# Altium PCB TIDA-PowerNBIoT_PCB.PcbDoc (part 1 of 3)
Units mil, origin at the board's own origin, x right, y up, seen from the top; angles counter-clockwise.
Board outline 2500 x 2750 mil, 2 copper layers (Top Layer, Bottom Layer), stack 38.548 mil thick; 82 components, 48 nets, 212 pads, 48 vias.
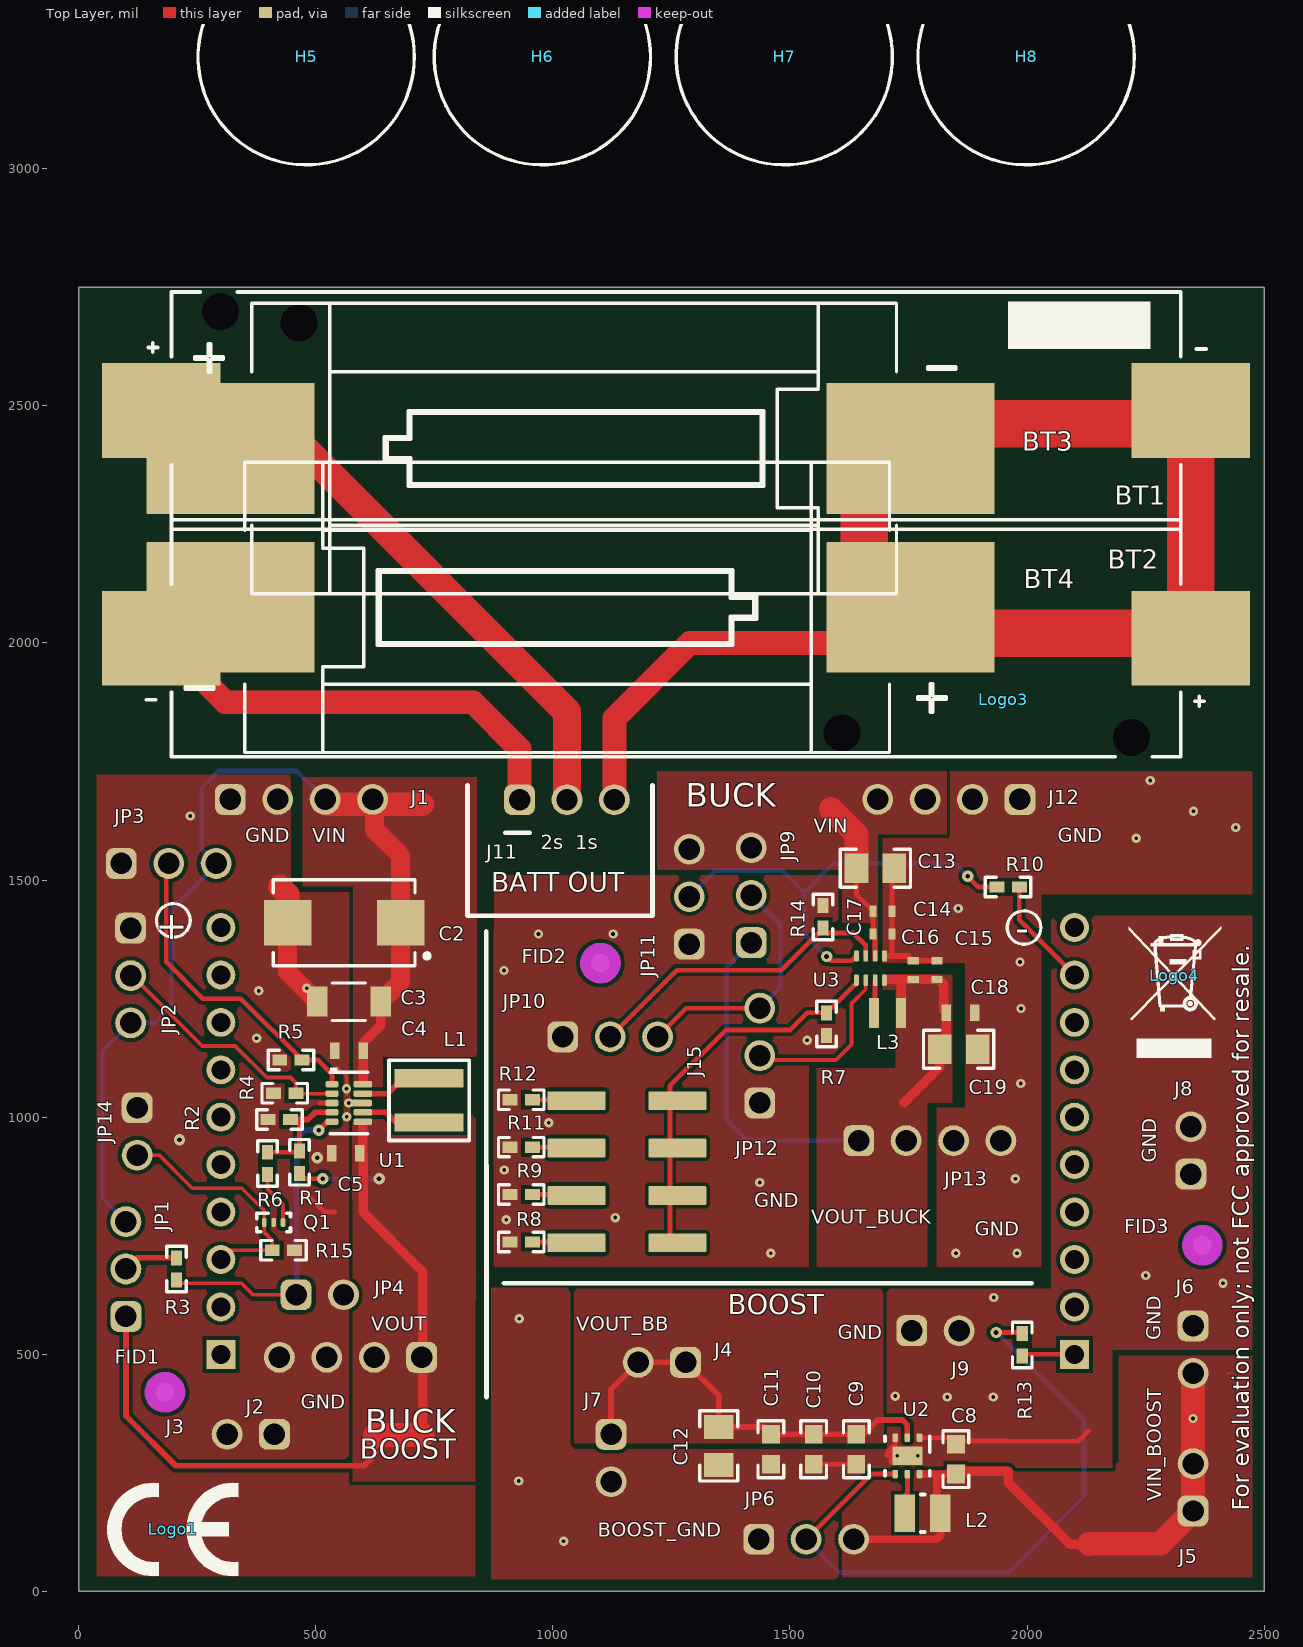
[diagram p0: Top Layer view]
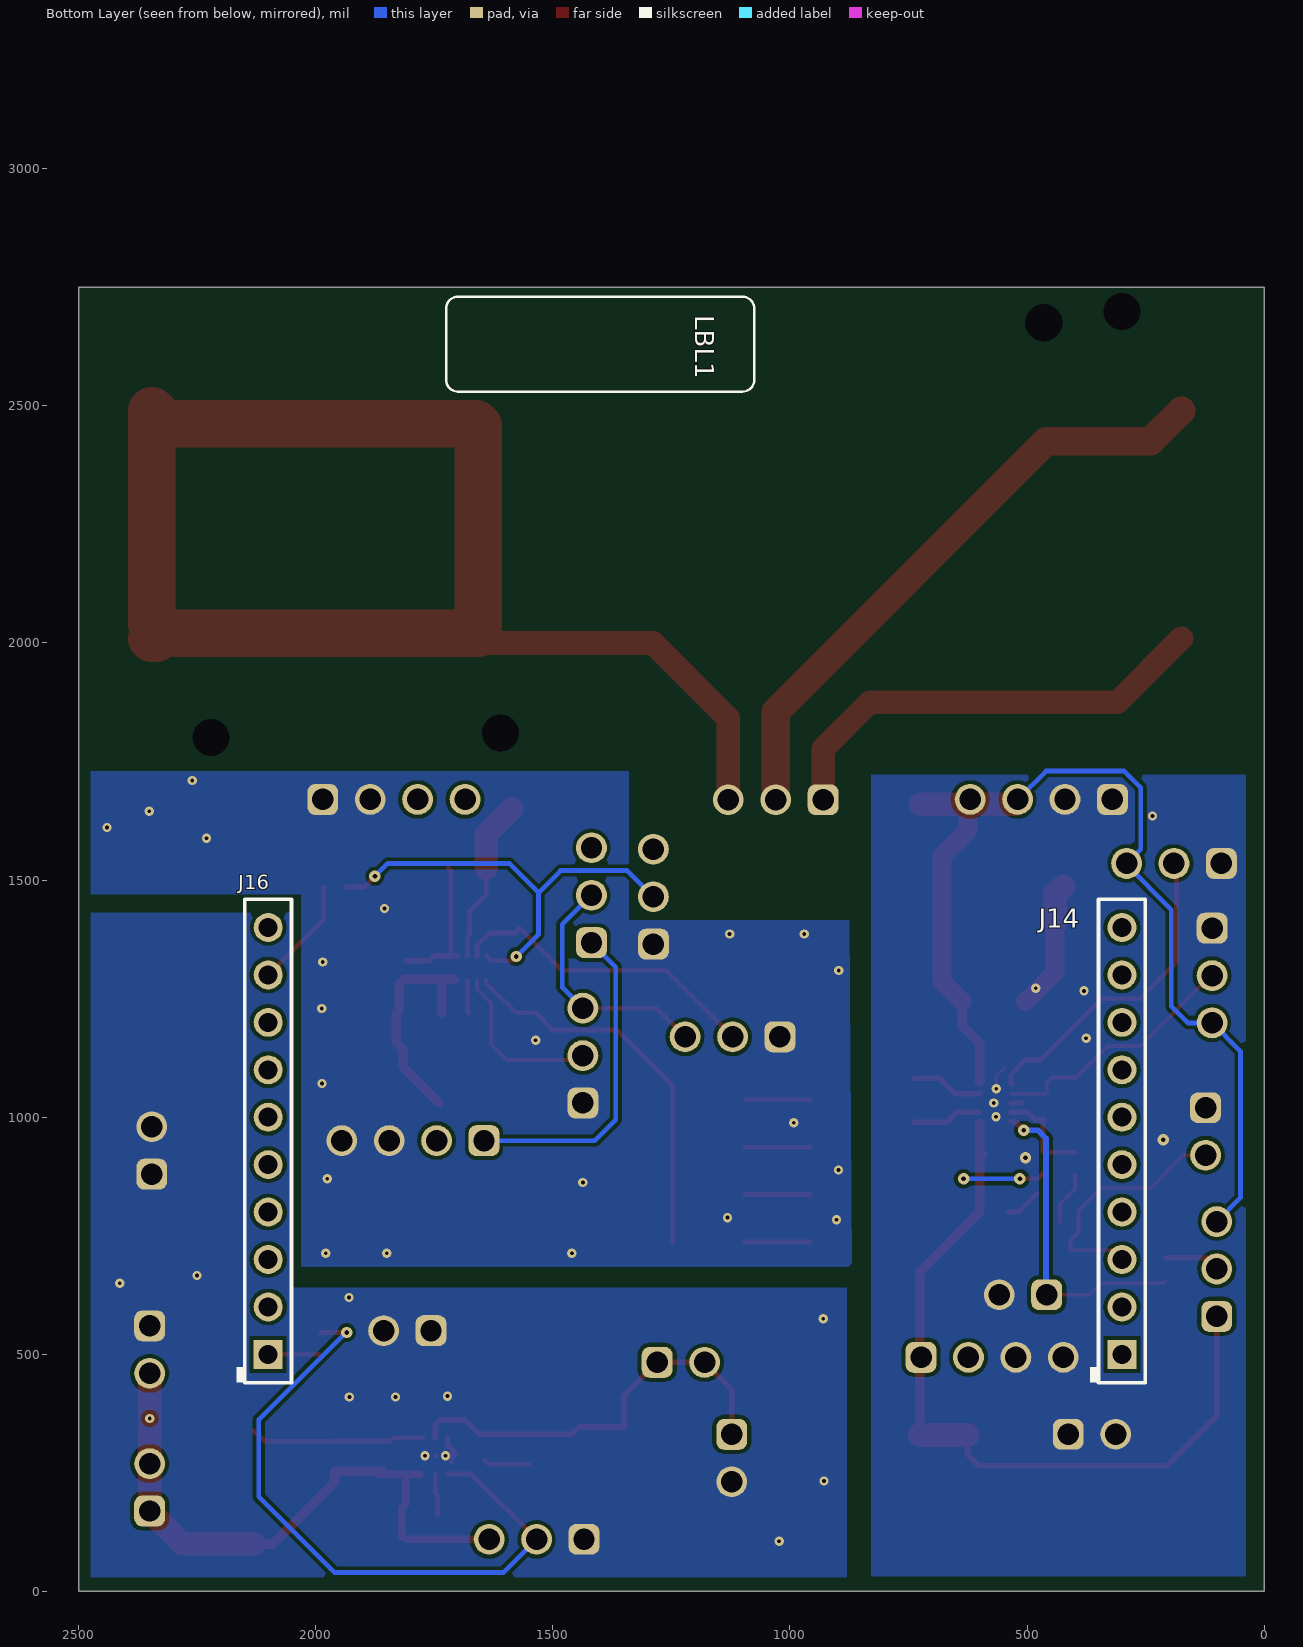
[diagram p1: Bottom Layer view, seen from below]

## Layer stack, top to bottom
Top Solder: solder mask 0.4, Solder Resist, Dk 3.5
Top Layer: signal copper 1.4
Dielectric1: core 35.748, FR-4, Dk 4.8
Bottom Layer: signal copper 1.4
Bottom Solder: solder mask 0.4, Solder Resist, Dk 3.5

## Board outline
0,0 2500,0 2500,2750 0,2750

## Design rules (kind name [scope] priority, off if disabled: settings)
AcuteAngle [All] p1: minimum=4.50000000000000E+0001 checktracksonly=FALSE
AssemblyTestPointUsage [All] p1: valid=2
BoardOutlineClearance BoardOutlineClearance_MountingHoles [OnCopper and InComponentClass('Mounting Holes')] p1: gap=40 ignorepadtopadclearanceinfootprint=FALSE except(30: Arc-OutlineEdge Track-OutlineEdge SMDPad-OutlineEdge)
BoardOutlineClearance BoardOutlineClearance_Poly [OnCopper and IsPoly] p2: gap=25 ignorepadtopadclearanceinfootprint=FALSE
BoardOutlineClearance [OnCopper and Not InComponentClass('Logo') and not InComponentClass('FiducialMark') and not InRegion(1000,500,4000,800) and not InPoly] p3: gap=40 ignorepadtopadclearanceinfootprint=FALSE
Clearance Clearance_Keepouts [((IsTrack Or IsArc) And Not InPoly) And IsFree and IsKeepOut vs ((IsTrack Or IsArc) And Not InPoly) And IsFree and IsKeepOut] p1: gap=0 ignorepadtopadclearanceinfootprint=FALSE
Clearance Clearance_Poly [InPolygon] p2: gap=8 ignorepadtopadclearanceinfootprint=FALSE except(0: Arc-Hole Track-Hole SMDPad-Hole THPad-Hole Via-Hole Fill-Hole Poly-Hole Region-Hole Text-Hole)
Clearance [All] p3: gap=5 ignorepadtopadclearanceinfootprint=FALSE except(0: Arc-Hole Track-Hole SMDPad-Hole THPad-Hole Via-Hole Fill-Hole Poly-Hole Region-Hole Text-Hole; 5.91: THPad-Via Via-Via; 7.87: THPad-THPad THPad-Fill THPad-Poly THPad-Region THPad-Text Via-Fill Via-Poly Via-Region Via-Text Fill-Fill Fill-Poly Fill-Region Fill-Text Poly-Poly Poly-Region Poly-Text Region-Region Region-Text Text-Text)
ComponentClearance ComponentClearance_MountingHoles_FiducialMarks [InComponentClass('Mounting Holes') vs InComponentClass('FiducialMark')] p1: gap=50 collisioncheckmode=3 verticalgap=10 showdistances=FALSE
ComponentClearance ComponentClearance_Shunt [InComponentClass('Header') vs InComponentClass('Shunt')] p2: gap=0 collisioncheckmode=3 verticalgap=0 showdistances=FALSE
ComponentClearance ComponentClearance_Logo [InComponentClass('Logo')] p3: gap=50 collisioncheckmode=3 verticalgap=10 showdistances=FALSE
ComponentClearance ComponentClearance_ScrewToNut [(HasFootprint('NY PMS 440 0025 PH')) vs (HasFootprint('Keystone_1902C'))] p4: gap=5 collisioncheckmode=3 verticalgap=10 showdistances=FALSE
ComponentClearance ComponentClearance_MountingHoles [InComponentClass('Mounting Holes')] p5: gap=250 collisioncheckmode=3 verticalgap=100000 showdistances=FALSE
ComponentClearance ComponentClearance_SmallPassives [HasFootprint('0201*') or HasFootprint('0402*') or HasFootprint('0508') or HasFootprint('0603*') or HasFootprint('0612') or HasFootprint('0805*') or HasFootprint('0815*') or HasFootprint('0830*') or HasFootprint('1206*') or HasFootprint('1210*') or HasFootprint('1808*') or HasFootprint('1812*') or HasFootprint('1825*') or HasFootprint('2010*') or HasFootprint('2220*') or HasFootprint('2225*') or HasFootprint('2512*') or HasFootprint('2728*') or HasFootprint('3518*') vs HasFootprint('0201*') or HasFootprint('0402*') or HasFootprint('0508') or HasFootprint('0603*') or HasFootprint('0612') or HasFootprint('0805*') or HasFootprint('0815*') or HasFootprint('0830*') or HasFootprint('1206*') or HasFootprint('1210*') or HasFootprint('1808*') or HasFootprint('1812*') or HasFootprint('1825*') or HasFootprint('2010*') or HasFootprint('2220*') or HasFootprint('2225*') or HasFootprint('2512*') or HasFootprint('2728*') or HasFootprint('3518*')] p6: gap=14.96 collisioncheckmode=3 verticalgap=10 showdistances=FALSE
ComponentClearance ComponentClearance_THtoSMT [IsThruComponent vs IsSMTComponent] p7: gap=30 collisioncheckmode=3 verticalgap=30 showdistances=FALSE
ComponentClearance ComponentClearance_THtoTH [IsThruComponent vs IsThruComponent] p8: gap=30 collisioncheckmode=3 verticalgap=30 showdistances=FALSE
ComponentClearance [All] p9: gap=25 collisioncheckmode=3 verticalgap=10 showdistances=FALSE
DiffPairsRouting [All] p1: maxlimit=100 minlimit=10 mostfreqgap=10 toplayer_minwidth=15 toplayer_maxwidth=15 toplayer_prefwidth=15 bottomlayer_minwidth=15 bottomlayer_maxwidth=15 bottomlayer_prefwidth=15 maxuncoupledlength=1000
FabricationTestPointUsage TestPointUsage [All] p1: valid=2 allowmultiple=FALSE
FabricationTestpoint Testpoint [All] p1: side=3 testpointundercomponent=TRUE minsize=40 maxsize=100 preferedsize=60 minholesize=0 maxholesize=40 preferedholesize=32 testpointgrid=1 allowsidetop=TRUE allowsidebottom=TRUE usegrid=TRUE gridtolerance=0.01
FanoutControl Fanout_LCC [IsLCC] p1: bgadir=Out bgaviamode=Centered fanoutstyle=Auto fanoutdirection=Alternating viagrid=1 // Fanout_LCC (Default Rule)
FanoutControl Fanout_BGA [IsBGA] p2: bgadir=Out bgaviamode=Centered fanoutstyle=Auto fanoutdirection=Alternating viagrid=1 // Fanout_BGA (Default Rule)
FanoutControl Fanout_Default [All] p4: bgadir=Out bgaviamode=Centered fanoutstyle=Auto fanoutdirection=Alternating viagrid=1 // Fanout_Default (Default Rule)
FanoutControl Fanout_Small [(CompPinCount < 5)] p5: bgadir=Out bgaviamode=Centered fanoutstyle=Auto fanoutdirection=OutThenIn viagrid=1 // Fanout_Small (Default Rule)
HoleSize [All] p1: absolutevalues=TRUE maxlimit=251 minlimit=6 maxpercent=80.000 minpercent=20.000
MinimumAnnularRing MinimumAnnularRing_ThermalPadVias [IsVia and InAnyComponent] p1: minimumring=5.91
MinimumAnnularRing [All] p2: minimumring=5.9
MinimumSolderMaskSliver MinimumSolderMaskSliver_Logo [InComponentClass('Logo') vs InComponentClass('Logo')] p1: minsoldermaskwidth=0.7
MinimumSolderMaskSliver [All] p2: minsoldermaskwidth=3.94
PlaneClearance [All] p1: clearance=7.87
PlaneConnect [All] p1: planeconnectstyle=Direct reliefexpansion=10 reliefentries=4 reliefconductorwidth=10 reliefairgap=10
PolygonConnect [All] p1: connectstyle=Direct reliefconductorwidth=10 reliefentries=4 polygonreliefangle="90 Angle" airgapwidth=10
RoutingVias ThermalPadVias [IsVia and InAnyComponent] p1: holewidth=7.87 width=19.68 viastyle="Through Hole" minholewidth=7.87 minwidth=19.68 maxholewidth=12.99 maxwidth=23.62
RoutingVias [All] p2: holewidth=12 width=24 viastyle="Through Hole" minholewidth=7.87 minwidth=19.5 maxholewidth=40 maxwidth=30
SilkToBoardRegionClearance [Not ((IsComment or IsDesignator) And (Hide <> 'False')) and not InRegion(1000,500,4000,800)] p1:
SilkToSilkClearance SilkToSilkClearance_Pb-FreeLogo [(HasFootprint('Pb-Free_Overlay_Medium') OR HasFootprint('Pb-Free_Overlay_Small')) vs (HasFootprint('Pb-Free_Overlay_Medium') OR HasFootprint('Pb-Free_Overlay_Small'))] p1: silktosilkclearance=0
SilkToSilkClearance [All] p2: silktosilkclearance=4
SilkToSolderMaskClearance SilkToComponentPadClearance [(IsPad or IsFill or IsRegion) and InAnycomponent] p1: minsilkscreentomaskgap=5 clearancetoexposedcopper=TRUE
SilkToSolderMaskClearance "Silk to Solder Mask Opening" [All] p2: minsilkscreentomaskgap=4 clearancetoexposedcopper=FALSE
SolderMaskExpansion [All] p1: expansion=1.97
Width [All] p1: maxlimit=100 minlimit=6 preferedwidth=10 checkconnectedcopper=TRUE
14 further rules are at their usual default settings.

## Classes and differential pairs
component class TIDA-PowerNBIoT_EVM_Hardware: FID1 FID2 FID3 H5 H6 H7 H8 LBL1 Logo1 Logo3 Logo4 ZZ1 ZZ2 ZZ3 ZZ4
component class FiducialMark: FID1 FID2 FID3
component class AssemblyNote: ZZ1 ZZ2 ZZ3 ZZ4
component class Label: LBL1
component class TIDA-PowerNB_BuckBoost: C2 C3 C4 C5 J1 J2 J3 JP1 JP2 JP3 JP4 JP14 L1 Q1 R1 R2 R3 R4 R5 R6 R15 U1
component class Header: J1 J2 J3 J4 J5 J6 J7 J8 J9 J11 J12 J15 JP1 JP2 JP3 JP4 JP6 JP9 JP10 JP11 JP12 JP13 JP14
component class TIDA-PowerNBIoT_Boost: C8 C9 C10 C11 C12 J4 J5 J6 J7 J8 J9 JP6 L2 U2 U5
component class TIDA-PowerNBIoT_Buck: BT1 BT2 BT3 BT4 C13 C14 C15 C16 C17 C18 C19 C20 C21 C24 J11 J12 J14 J15 J16 J17 J18 JP9 JP10 JP11 JP12 JP13 L3 R7 R8 R9 R10 R11 R12 R13 R14 U3 U4

## Components (designator, comment, footprint, x,y, rotation, side; value= is the part's Value field where it differs from the comment)
BT1 "1020" Keystone_1020 1260,2490 r0 top
BT2 "1020" Keystone_1020 1260,2010 r180 top
BT3 "1010" BAT_1010 1037.44,2410.04 r0 top
BT4 "1010" BAT_1010 1037.56,2074.96 r180 top
C2 "Cap_Polarized" 7343-31 560,1410 r180 top value=68uF
C3 "Capacitor" 1206_190 570,1243.62 r180 top value=22uF
C4 "Capacitor" 0603S 570,1140 r180 top value=10uF
C5 "Capacitor" 0603S 563.5,923.63 r180 top value=22uF
C8 "GRM188Z71A106MA73D" 0603 1850,279.11 r90 top value=10uF
C9 "GRM188Z71A106MA73D" 0603 1640,300 r270 top value=10uF
C10 "GRM188Z71A106MA73D" 0603 1550,300 r270 top value=10uF
C11 "GRM188Z71A106MA73D" 0603 1460,300 r270 top value=10uF
C12 "TMK212B7225KG-TR" 0805_HV 1350,306.85 r270 top value=22uF
C13 "GRM21BR61A476ME15L" 0805_HV 1680.24,1524.96 r0 top value=47uF
C14 "GRM155R61A475MEAAD" 0402S 1695.35,1434.41 r0 top value=4.7uF
C15 "GRM155R60G106ME44D" 0402_070 1810,1310 r90 top value=10uF
C16 "GRM155R60G106ME44D" 0402_070 1760,1310 r90 top value=10uF
C17 "GRM155R61A475MEAAD" 0402S 1695.35,1386.22 r0 top value=4.7uF
C18 "GRM188R60J475ME19D" 0603S 1860,1220 r0 top value=4.7uF
C19 "GRM21BR70J106KE76L" 0805_HV 1855.78,1143.27 r0 top value=10uF
FID1 "Fiducial" Fiducial10-20 182.2,420 r0 top
FID2 "Fiducial" Fiducial10-20 1100.59,1324.93 r0 top
FID3 "Fiducial" Fiducial10-20 2369.68,730 r0 top
H5 "SJ-5303 (CLEAR)" Bumpon_SJ5003Transparent 480,3236 r0 top
H6 "SJ-5303 (CLEAR)" Bumpon_SJ5003Transparent 978,3236 r0 top
H7 "SJ-5303 (CLEAR)" Bumpon_SJ5003Transparent 1488,3236 r0 top
H8 "SJ-5303 (CLEAR)" Bumpon_SJ5003Transparent 1998,3236 r0 top
J1 "61300411121" WURTH_61300411121 470,1670 r0 top
J2 "61300411121" WURTH_61300411121 573.5,493.64 r180 top
J3 "61300211121" WURTH_61300211121 363.21,331.5 r180 top
J4 "61300211121" WURTH_61300211121 1230,483.07 r180 top
J5 "61300211121" WURTH_61300211121 2350,219.68 r90 top
J6 "61300211121" WURTH_61300211121 2350,510 r270 top
J7 "61300211121" WURTH_61300211121 1122.81,281.26 r270 top
J8 "61300211121" WURTH_61300211121 2345.43,930 r90 top
J9 "61300211121" WURTH_61300211121 1806.77,550 r0 top
J11 "61300311121" WURTH_61300311121 1030,1669.41 r0 top
J12 "61300411121" WURTH_61300411121 1835,1670 r180 top locked
J14 "61301011821" Wurth_61301011821 300,950 r90 bottom locked
J15 "61000821121" Wurth_61000821121 1156.36,885 r180 top
J16 "61301011821" Wurth_61301011821 2100,950 r90 bottom locked
JP1 "61300311121" WURTH_61300311121 100,680 r90 top
JP2 "61300311121" WURTH_61300311121 109.8,1298.74 r270 top
JP3 "61300311121" WURTH_61300311121 190.2,1535 r0 top
JP4 "61300211121" WURTH_61300211121 508.75,625.51 r0 top
JP6 "61300311121" WURTH_61300311121 1534.16,110 r0 top
JP9 "61300311121" WURTH_61300311121 1418.39,1468.1 r90 top
JP10 "61300311121" WURTH_61300311121 1121,1169.44 r0 top
JP11 "61300311121" WURTH_61300311121 1287.81,1464.96 r90 top
JP12 "61300311121" WURTH_61300311121 1436.49,1130.03 r90 top
JP13 "61300411121" WURTH_61300411121 1795,950.65 r0 top
JP14 "61300211121" WURTH_61300211121 123.62,970 r270 top
L1 "74438356010" WE-MAPI_4020 739.13,1035.65 r270 top value=1uH
L2 "74404024022" WE_LQS_252012 1780,165 r180 top value=2.2uH
L3 "DFE201612E-2R2M=P2" DFE201612E 1705.83,1220 r0 top value=2.2uH
LBL1 "THT-14-423-10" Label_650x200 1400,2630 r180 bottom
Logo1 "CE Mark" CE_Mark_5mm 198.57,130.71 r0 top
Logo3 "FCC disclaimer" FCC_disclaimer 1950,1880 r0 top
Logo4 "WEEE logo" WEEE_Minimum 2310,1297.81 r0 top
Q1 "CSD13385F5" YJK0003A 411.5,778.05 r0 top value=12V
R1 "CRCW0402511KFKED" 0402 466.18,905 r270 top value=511k
R2 "CRCW040290K9FKED" 0402 423.5,995 r0 top value=90.9k
R3 "RC0402FR-07100KL" 0402 206.67,680 r90 top value=100k
R4 "CRCW04021M00FKED" 0402 435,1050.47 r0 top value=1.00Meg
R5 "CRCW04021M00FKED" 0402 447.94,1120.65 r0 top value=1.00Meg
R6 "CRCW040290K9FKED" 0402 398.63,902.53 r90 top value=90.9k
R7 "ERJ-2RKF2673X" 0402 1577.27,1196.38 r270 top value=267k
R8 "ERJ-2RKF2673X" 0402 933.56,736.89 r180 top value=267k
R9 "CRCW0402102KFKED" 0402 933.56,836.89 r180 top value=102k
R10 "ERJ-2BSFR10X" 0402 1960,1485.38 r180 top value=0.1
R11 "CRCW040271K5FKED" 0402 933.56,936.89 r180 top value=71.5k
R12 "CRCW040252K3FKED" 0402 933.56,1036.89 r180 top value=52.3k
R13 "ERJ-2BSFR10X" 0402 1990,520 r90 top value=0.1
R14 "CRCW04021M00FKED" 0402 1570,1422.36 r270 top value=1.00Meg
R15 "ERJ-2RKF1002X" 0402 432.17,719.42 r180 top value=10.0k
U1 "TPS63802DLAR" DLA0010A 570,1030 r0 top locked
U2 "TPS610995DRVR" DRV0006A 1747.72,286 r270 top
U3 "TPS62840DLCR" DLC0008B 1669.76,1314.41 r270 top
ZZ1 "This Assembly Note is for PCB labels only" AssemblyNoteLabel 206.67,4000 r0 top
ZZ2 "These assemblies are ESD sensitive, ESD precautions shall be observed." AssemblyNote 205,3850 r0 top
ZZ3 "These assemblies must be clean and free from flux and all contaminants. Use of no clean flux is not acceptable." AssemblyNote 200,3700 r0 top
ZZ4 "These assemblies must comply with workmanship standards IPC-A-610 Class 2, unless otherwise specified." AssemblyNote 195.83,3600 r0 top

## Footprints (in the part's own frame and the unit in brackets; to place one, negate y for a bottom-side part, rotate by r counter-clockwise, add the part's x,y. Pads: shape width x height; smd on the part's side, far side on the other; paste and mask are expansions set on the pad)
0402 [mm] "0402 from SM-752 data"
  rect 0.8x0.6 smd: 1(-0.6,0) 2(0.6,0)
  silkscreen extent -1.22,-0.52 1.22,0.52, body extent -0.55,-0.3 0.55,0.3, height 0.6
0402_070 [mil] "SMD, 2-Leads, Body 1.2x0.7mm, Height 0.7mm"
  rect 15x24 smd: 1(-20,0) 2(20,0)
  body extent -24,-14 24,14, height 28
0402S [mil] "Based on C0402S footprint from PADS legacy"
  rect 15x24 smd: 1(-20,0) 2(20,0)
  body extent -22,-12 22,12, height 24
0603 [mm] "0603 from SM-752 data"
  rect 1x0.95 smd: 1(-0.8,0) 2(0.8,0)
  silkscreen extent -1.52,-0.69 1.52,0.69, body extent -0.87,-0.47 0.87,0.47, height 1
0603S [mil]
  rect 20x35 smd: 1(-30,0) 2(30,0)
  body extent -34,-19 34,19, height 39
0805_HV [mil] "0805 with 30mil clearance between pads"
  rect 50x63 smd: 1(-40,0) 2(40,0)
  silkscreen extent -74,-40 74,40, body extent -43,-29 43,29, height 57
1206_190 [mm] "1206_190"
  rect 1.1x1.6 smd: 1(-1.7,0) 2(1.7,0)
  silkscreen extent -0.9,-1 0.9,1, body extent -1.75,-0.95 1.75,0.95, height 1.9
7343-31 [mm] "Medium Density based on Kemet T495 dimensions"
  rect 2.55x2.45 smd: 1(-3.025,0) 2(3.025,0)
  silkscreen extent -4.56,-2.3 3.8,2.3, body extent -3.8,-2.3 3.8,2.3, height 3.1
AssemblyNote [mil] "Assembly Note"
AssemblyNoteLabel [mil] "Assembly Note for PCB Labels"
BAT_1010 [mm] "Keystone"
  round 0.94 hole 1.994 unplated: 0(-14.54,6.73)
  rect 9x7 smd: 1(-18.21,0) 2(18.21,0)
  silkscreen extent -20.12,-7.77 20.64,7.77, body extent -21.7,-7.77 22.07,7.77, height 15.06
Bumpon_SJ5003Transparent [mil] "3M Hemispherical Bumpon transparent"
  round 1 on Mech3: 0(0,0)
  silkscreen extent -228,-228 228,228, body extent -217,-218 219,218, height 197
CE_Mark_5mm [mil] "Minimum text height for CE Mark"
  silkscreen extent -138,-98 138,98
DFE201612E [mm] "MuRata recommended"
  rrect18% 0.55x1.6 smd: 1(-0.725,0) 2(0.725,0)
  body extent -1.1,-0.9 1.1,0.9, height 1.2
DLA0010A [mm] "PQFN, 10-Leads, Body 2x3mm, Pitch 0.5mm"
  rrect57% 0.7x0.35 smd paste-0.05 mask-0.05: 1(-0.9,1) 2(-0.9,0.5) 3(-0.9,0) 4(-0.9,-0.5) 5(-0.9,-1)
  rrect57% 1x0.35 smd paste-0.05 mask-0.05: 6(0.75,-1) 7(0.75,-0.5) 9(0.75,0.5) 10(0.75,1)
  rrect57% 1.4x0.35 smd paste-1 mask-0.05: 8(0.55,0)
  rrect40% 0.55x0.25 on Top Paste: ""(0.175,0) ""(0.925,0)
  silkscreen extent -1,-1.65 1,1.9, body extent -1.05,-1.55 1.05,1.55, height 1
DLC0008B [mm] "VSON-HR-8"
  rrect40% 0.6x0.25 smd: 1(-0.65,0.75) 2(-0.65,0.25) 3(-0.65,-0.25) 4(-0.65,-0.75) 5(0.65,-0.75) 6(0.65,-0.25) 7(0.65,0.25) 8(0.65,0.75)
  body extent -0.75,-1 0.75,1, height 1
DRV0006A [mm] "SON, 6-Leads, Body 2x2mm, Pitch 0.65mm, Thermal Pad 1.6x1mm, TI Recommended"
  rrect33% 0.45x0.3 smd: 1(-0.975,0.65) 2(-0.975,0) 3(-0.975,-0.65) 4(0.975,-0.65) 5(0.975,0) 6(0.975,0.65)
  rrect14% 1x0.7 on Top Paste: 7(0,0.45) 7(0,-0.45)
  rrect10% 1x1.6 smd paste-0.5: 7(0,0)
  silkscreen extent -1.05,-1.2 1.05,1.2, body extent -1.05,-1.05 1.05,1.05, height 0.81
FCC_disclaimer [mil]
Fiducial10-20 [mm]
  round 1 smd mask+0.5: 1(0,0)
  Top Layer keep-out circle w1.178: c0,0 r0.5
Keystone_1020 [mm] "HOLDER BATTERY AAA, SMT"
  rect 6.35x5.08 smd: 1(-27.57,0) 2(27.57,0)
  rect 0x0 hole 1.98 unplated: ALIGN(-24.395,5.31)
  silkscreen extent -28.27,-6.35 28.38,6.35, body extent -30.76,-6.35 30.75,6.35, height 11.27
Label_650x200 [mil] "Thermal Transfer Label"
  round 1 on Mech14: 0(0,0)
  silkscreen extent -325,-100 325,100, body extent -325,-100 325,100, height 1
WE-MAPI_4020 [mm] "SMD, 2-Leads, Body 4.1x4.1mm"
  rect 0.98x3.7 smd: 1(-1.185,0) 2(1.185,0)
  silkscreen extent -2.15,-2.15 2.15,2.15, body extent -2.15,-2.15 2.15,2.15, height 2.1
WE_LQS_252012 [mm] "SMD, 2-Leads, Body 2.5x2mm, Pitch 1.9mm"
  rect 1.1x2 smd: 1(-0.95,0) 2(0.95,0)
  silkscreen extent -0.1,-1 0.1,1, body extent -1.25,-1 1.25,1, height 1.2
WEEE_Minimum [mil] "WEEElie bin"
  silkscreen extent -95,-172 99,104
Wurth_61000821121 [mm] "Header, 2.54mm, 4x2, SMT"
  rrect10% 3.1x1 smd: 1(-2.7,3.81) 2(2.7,3.81) 3(-2.7,1.27) 4(2.7,1.27) 5(-2.7,-1.27) 6(2.7,-1.27) 7(-2.7,-3.81) 8(2.7,-3.81)
  body extent -3.75,-5.08 3.75,5.08, height 9.6
WURTH_61300211121 [mm] "Header, 2.54mm, 2x1, TH"
  rrect50% 1.65x1.65 hole 1.15: 1(-1.27,0)
  round 1.65 hole 1.15: 2(1.27,0)
  body extent -2.54,-1.27 2.54,1.27, height 8.54
WURTH_61300311121 [mm] "Header, 2.54mm, 3x1, TH"
  rrect50% 1.65x1.65 hole 1.15: 1(-2.54,0)
  round 1.65 hole 1.15: 2(0,0) 3(2.54,0)
  body extent -3.81,-1.27 3.81,1.27, height 8.54
WURTH_61300411121 [mm] "Header, 2.54mm, 4x1, TH"
  rrect50% 1.65x1.65 hole 1.15: 1(-3.81,0)
  round 1.65 hole 1.15: 2(-1.27,0) 3(1.27,0) 4(3.81,0)
  body extent -5.08,-1.27 5.08,1.27, height 8.54
Wurth_61301011821 [mm] "Receptacle, 2.54mm, 10x1, TH"
  rect 1.55x1.55 hole 1.02: 1(-11.43,0)
  round 1.55 hole 1.02: 2(-8.89,0) 3(-6.35,0) 4(-3.81,0) 5(-1.27,0) 6(1.27,0) 7(3.81,0) 8(6.35,0) 9(8.89,0) 10(11.43,0)
  silkscreen extent -12.95,-1.25 12.95,1.7, body extent -12.95,-1.25 12.95,1.25, height 8.5
YJK0003A [mm] "SMD, 3-Leads, Body 1.49x0.73mm"
  rrect50% 0.2x0.39 on Top Paste: 1(-0.525,0) 2(0,0) 3(0.525,0)
  rrect80% 0.25x0.49 smd paste-0.15 mask-0.05: 1(-0.5,0) 2(0,0) 3(0.5,0)
  silkscreen extent -0.9,-0.5 0.9,0.5, body extent -0.75,-0.37 0.74,0.36, height 0.35

## Part data
BT1 BT2: library part CMP-0003908-1, "HOLDER BATTERY AAA, SMT", Manufacturer=Keystone, Supplier Part Number 1=36-1020-ND, ComponentLink1Description="Datasheet Link", ComponentLink1URL=http://www.keyelco.com/product-pdf.cfm?p=934, CompType="Battery Holder", Key=1020, LatestRevisionDate=2017-03-09, MountType=SMT, PackageReference="HOLDER BATTERY AAA, SMT", PartNumber=1020, Publisher="Texas Instruments", RoHS=Y, Supplier 1=Digi-Key, Supplier 2=Newark, Supplier 3=Mouser, Supplier Part Number 2=57R3959, Supplier Part Number 3=534-1020
BT3 BT4: library part CMP-0003630-1, "Battery Holder, Nylon, CR2, SMT", Manufacturer=Keystone, Supplier Part Number 1=36-1010-ND, ComponentLink1Description="Datasheet Link", ComponentLink1URL=http://www.keyelco.com/userAssets/store/files/1010.pdf, CompType="Battery Holder", Key=1010, LatestRevisionDate=2017-03-09, MountType=SMT, PackageReference="Battery holder", PartNumber=1010, Publisher="Texas Instruments", RoHS=Y, Supplier 1=Digi-Key, Supplier 2=Mouser, Supplier Part Number 2=534-1010
C2: library part CMP-0011790-2, "CAP, TA, 68 uF, 20 V, +/- 10%, 0.15 ohm, SMD", Cap_Case=D, Manufacturer=Kemet, PartNumber=T495D686K020ATE150, Supplier Part Number 1=399-3890-1-ND, Tolerance_%=10%, Value1="0.15 ohm", Value2=20V, ValueDisplayed=68uF, AEC Category=Q200, AEC Qualified=?, Cap_F=68µF, ComponentLink1Description="Datasheet link", ComponentLink1URL=http://www.kemet.com/Lists/ProductCatalog/Attachments/261/KEM_T2009_T495.pdf, CompType=Capacitor, ESR_ohm=1.5d, IRMS_A=9dA, LatestRevisionDate=2017-03-09, LatestRevisionNote="Updated supplier links", MountType=SMT, PackageReference=7343-31, Polarized=Y, Publisher="Texas Instruments", RoHS=Y, Series=T495, SizeArea_mm2=31.39, SizeAreaWB_mm2=58.59, SizeX_mm=7.3, SizeY_mm=4.3, SizeZ_mm=3.1, Supplier 1=Digi-Key, Supplier 2=Newark, Supplier 3=Mouser, Supplier Part Number 2=40K1101, Supplier Part Number 3=80-T495D686K20ATE150, TaMax_C=125°C, TaMin_C=-55°C, Technology=TA, U/M=EA, VDC_V=20V
C3: library part CMP-0009024-2, "CAP, CERM, 22 uF, 25 V, +/- 20%, X5R, 1206_190", Cap_Case=1206, Manufacturer="Taiyo Yuden", PartNumber=TMK316BBJ226ML-T, Supplier Part Number 1=587-3246-1-ND, TempCo=X5R, Tolerance_%=20%, Value1=Unknown, Value2=25V, ValueDisplayed=22uF, AEC Category=Q200, AEC Grade=N/A, AEC Qualified=N, Cap_F=22µF, ComponentLink1Description="Datasheet link", ComponentLink1URL=http://www.yuden.co.jp/productdata/catalog/en/mlcc_all_e.pdf, CompType=Capacitor, LatestRevisionDate=2017-03-09, MountType=SMT, PackageReference=1206_190, Polarized=N, Published=2008-06-19, Publisher="Texas Instruments", RoHS=Y, SizeArea_mm2=5.12, SizeAreaWB_mm2=10.92, SizeX_mm=3.2, SizeY_mm=1.6, SizeZ_mm=1.9, Supplier 1=Digi-Key, Supplier 2=Newark, Supplier 3=Mouser, Supplier Part Number 2=29X1397, Supplier Part Number 3=963-TMK316BBJ226ML-T, TaMax_C=85°C, TaMin_C=-55°C, Technology=Ceramic, U/M=EA, VDC_V=25V
C4: library part CMP-0007304-5, "CAP, CERM, 10 uF, 6.3 V, +/- 20%, X5R, 0603", Cap_Case=0603, Manufacturer=MuRata, PartNumber=GRM188R60J106ME84, Supplier Part Number 1=490-7316-1-ND, TempCo=X5R, Tolerance_%=20%, Value1=Unknown, Value2=6.3V, ValueDisplayed=10uF, AEC Category=Q200, AEC Qualified=?, Cap_F=10µF, ComponentLink1Description="Datasheet link", ComponentLink1URL=http://search.murata.co.jp/Ceramy/image/img/A01X/G101/ENG/GRM188R60J106ME84-01.pdf, CompType=Capacitor, LatestRevisionDate=2017-03-09, MountType=SMT, PackageReference=0603, Polarized=N, Published=2008-06-19, Publisher="Texas Instruments", RoHS=Y, SizeArea_mm2=1.28, SizeAreaWB_mm2=4.68, SizeX_mm=1.6, SizeY_mm=0.8, SizeZ_mm=1, Supplier 1=Digi-Key, TaMax_C=85°C, TaMin_C=-55°C, Technology=Ceramic, U/M=EA, VDC_V=6.3V
C5: library part CMP-0007306-5, "CAP, CERM, 22 uF, 6.3 V, +/- 20%, X5R, 0603", Cap_Case=0603, Manufacturer=MuRata, PartNumber=GRM188R60J226MEA0D, Supplier Part Number 1=490-7611-1-ND, TempCo=X5R, Tolerance_%=20%, Value1=Unknown, Value2=6.3V, ValueDisplayed=22uF, AEC Category=Q200, AEC Grade=N/A, AEC Qualified=N, Cap_F=22µF, ComponentLink1Description="Datasheet link", ComponentLink1URL=http://search.murata.co.jp/Ceramy/image/img/A01X/G101/ENG/GRM188R60J226MEA0-01.pdf, CompType=Capacitor, LatestRevisionDate=2017-03-09, MountType=SMT, PackageReference=0603, Polarized=N, Published=2008-06-19, Publisher="Texas Instruments", RoHS=Y, SizeArea_mm2=1.28, SizeAreaWB_mm2=4.68, SizeX_mm=1.6, SizeY_mm=0.8, SizeZ_mm=1, Supplier 1=Digi-Key, Supplier 2=Newark, Supplier 3=Mouser, Supplier Part Number 2=55Y9854, Supplier Part Number 3=81-GRM188R60J226ME0D, TaMax_C=85°C, TaMin_C=-55°C, Technology=Ceramic, U/M=EA, VDC_V=6.3V
C8 C9 C10 C11: library part CMP-0007497-5, "CAP, CERM, 10 uF, 10 V, +/- 20%, X7R, 0603", Cap_Case=0603, Manufacturer=MuRata, Supplier Part Number 1=81-GRM188Z71A106MA3D, TempCo=X7R, Tolerance_%=20%, Value1=Unknown, Value2=10V, ValueDisplayed=10uF, AEC Category=Q200, AEC Grade=N/A, AEC Qualified=N, Cap_F=10µF, ComponentLink1Description="Datasheet link", ComponentLink1URL=http://psearch.en.murata.com/capacitor/product/GRM188Z71A106MA73%23.pdf, CompType=Capacitor, LatestRevisionDate=2017-03-09, MountType=SMT, PackageReference=0603, PartNumber=GRM188Z71A106MA73D, Polarized=N, Published=2008-06-19, Publisher="Texas Instruments", RoHS=Y, SizeArea_mm2=1.28, SizeAreaWB_mm2=4.68, SizeX_mm=1.6, SizeY_mm=0.8, SizeZ_mm=1, Supplier 1=Mouser, TaMax_C=125°C, TaMin_C=-55°C, Technology=Ceramic, U/M=EA, VDC_V=10V
C12: library part CMP-0080705-1, "CAP, CERM, 22 µF, 25 V,+/- 10%, X7R, 0805", Cap_Case=0805, Manufacturer="Taiyo Yuden", Supplier Part Number 1=587-2991-1-ND, TempCo=X7R, Tolerance_%=10%, Value2=25V, ValueDisplayed=22µF, AEC Category=Q200, AEC Grade=N/A, AEC Qualified=N, Cap_F=22µF, ComponentLink1Description="Datasheet link", ComponentLink1URL=https://www.yuden.co.jp/productdata/catalog/mlcc_all_e.pdf, CompType=Capacitor, MountType=SMT, PackageReference=0805, PartNumber=TMK212B7225KG-TR, Polarized=N, RoHS=Y, SizeArea_mm2=2.5, SizeAreaWB_mm2=6.75, SizeX_mm=2, SizeY_mm=1.25, SizeZ_mm=1.45, Supplier 1=Digi-Key, Supplier 2=Newark, Supplier 3=Mouser, Supplier Part Number 2=92T9715, Supplier Part Number 3=963-TMK212B7225KG-TR, TaMax_C=125°C, TaMin_C=-55°C, Technology=Ceramic, U/M=EA, VDC_V=25V
C13: library part CMP-0078699-1, "CAP, CERM, 47 µF, 10 V,+/- 20%, X5R, 0805", Cap_Case=0805, Manufacturer=MuRata, Supplier Part Number 1=490-9961-1-ND, TempCo=X5R, Tolerance_%=20%, Value2=10V, ValueDisplayed=47µF, AEC Category=Q200, AEC Grade=N/A, AEC Qualified=N, Cap_F=47µF, ComponentLink1Description="Datasheet link", ComponentLink1URL=http://search.murata.co.jp/Ceramy/image/img/A01X/G101/ENG/GRM21BR61A476ME15-01.pdf, CompType=Capacitor, Green_EU RoHS=Passed, Green_EU RoHS-2=Incomplete, Green_Lifecycle=Active, Green_REACh=Passed, MountType=SMT, PackageReference=0805, PartNumber=GRM21BR61A476ME15L, Polarized=N, RoHS=Y, SizeArea_mm2=2.5, SizeAreaWB_mm2=6.75, SizeX_mm=2, SizeY_mm=1.25, SizeZ_mm=1.45, Supplier 1=Digi-Key, Supplier 2=Newark, Supplier 3=Mouser, Supplier Part Number 2=96Y9273, Supplier Part Number 3=81-GRM21BR61A476ME5L, TaMax_C=85°C, TaMin_C=-55°C, Technology=Ceramic, U/M=EA, VDC_V=10V
C14 C17: library part CMP-0006582-2, "CAP, CERM, 4.7 uF, 10 V, +/- 20%, X5R, 0402", Cap_Case=0402, Manufacturer=MuRata, TempCo=X5R, Tolerance_%=20%, Value1=Unknown, Value2=10V, ValueDisplayed=4.7uF, AEC Category=Q200, AEC Grade=N/A, AEC Qualified=N, Cap_F=4.7µF, ComponentLink1Description="Datasheet link", ComponentLink1URL=http://search.murata.co.jp/Ceramy/image/img/A01X/G101/ENG/GRM155R61A475MEAA-01.pdf, CompType=Capacitor, LatestRevisionDate=2017-03-09, MountType=SMT, PackageReference=0402, PartNumber=GRM155R61A475MEAAD, Polarized=N, Published=2008-06-19, Publisher="Texas Instruments", RoHS=Y, SizeArea_mm2=0.5, SizeAreaWB_mm2=3, SizeX_mm=1, SizeY_mm=0.5, SizeZ_mm=0.6, TaMax_C=85°C, TaMin_C=-55°C, Technology=Ceramic, U/M=EA, VDC_V=10V
C15 C16: library part CMP-0006528-2, "CAP, CERM, 10 uF, 4 V, +/- 20%, X5R, 0402", Cap_Case=0402, Manufacturer=MuRata, Supplier Part Number 1=GRM155R60G106ME44D-ND, TempCo=X5R, Tolerance_%=20%, Value1=Unknown, Value2=4V, ValueDisplayed=10uF, AEC Category=Q200, AEC Grade=N/A, AEC Qualified=N, Cap_F=10µF, ComponentLink1Description="Datasheet link", ComponentLink1URL=http://psearch.murata.com/capacitor/product/GRM155R60G106ME44%23.pdf, CompType=Capacitor, LatestRevisionDate=2017-03-09, MountType=SMT, PackageReference=0402, PartNumber=GRM155R60G106ME44D, Polarized=N, Published=2008-06-19, Publisher="Texas Instruments", RoHS=Y, SizeArea_mm2=0.5, SizeAreaWB_mm2=3, SizeX_mm=1, SizeY_mm=0.5, SizeZ_mm=0.7, Supplier 1=Digi-Key, Supplier 2=Mouser, Supplier Part Number 2=81-GRM155R60G106ME4D, TaMax_C=85°C, TaMin_C=-55°C, Technology=Ceramic, U/M=EA, VDC_V=4V
C18: library part CMP-0007312-5, "CAP, CERM, 4.7 uF, 6.3 V, +/- 20%, X5R, 0603", Cap_Case=0603, Manufacturer=MuRata, Supplier Part Number 1=490-5421-1-ND, TempCo=X5R, Tolerance_%=20%, Value1="0.001 ohm", Value2=6.3V, ValueDisplayed=4.7uF, AEC Category=Q200, AEC Qualified=?, Cap_F=4.7µF, ComponentLink1Description="Datasheet link", ComponentLink1URL=http://search.murata.co.jp/Ceramy/image/img/PDF/ENG/GRM188R60J475ME19.pdf, CompType=Capacitor, ESR_ohm=1m, LatestRevisionDate=2017-03-09, MountType=SMT, PackageReference=0603, PartNumber=GRM188R60J475ME19D, Polarized=N, Published=2008-06-19, Publisher="Texas Instruments", RoHS=Y, SizeArea_mm2=1.28, SizeAreaWB_mm2=4.68, SizeX_mm=1.6, SizeY_mm=0.8, SizeZ_mm=1, Supplier 1=Digi-Key, Supplier 2=Mouser, Supplier Part Number 2=81-GRM188R60J475ME9D, TaMax_C=85°C, TaMin_C=-55°C, Technology=Ceramic, U/M=EA, VDC_V=6.3V
C19: library part CMP-0008311-2, "CAP, CERM, 10 uF, 6.3 V, +/- 10%, X7R, 0805", Cap_Case=0805, Manufacturer=MuRata, Supplier Part Number 1=490-3904-1-ND, TempCo=X7R, Tolerance_%=10%, Value1=Unknown, Value2=6.3V, ValueDisplayed=10uF, AEC Category=Q200, AEC Qualified=?, Cap_F=10µF, ComponentLink1Description="Datasheet link", ComponentLink1URL=http://search.murata.co.jp/Ceramy/PnsearchViewAction.do?HnOFG=ON&HnNFG=ON&SEL_CNT=50&sLang=en&sKey=GRM21BR70J106KE76L&x=9&y=9&search=startwith, CompType=Capacitor, LatestRevisionDate=2017-03-09, MountType=SMT, PackageReference=0805, PartNumber=GRM21BR70J106KE76L, Polarized=N, Published=2008-06-19, Publisher="Texas Instruments", RoHS=Y, SizeArea_mm2=2.5, SizeAreaWB_mm2=6.75, SizeX_mm=2, SizeY_mm=1.25, SizeZ_mm=1.45, Supplier 1=Digi-Key, Supplier 2=Mouser, Supplier 3=Farnell, Supplier Part Number 2=81-GRM21BR70J106KE76, Supplier Part Number 3=1845768, TaMax_C=125°C, TaMin_C=-55°C, Technology=Ceramic, U/M=EA, VDC_V=6.3V
FID1 FID2 FID3: library part CMP-0077181-1, "Fiducial mark.  There is nothing to buy or mount.", Manufacturer=N/A, ClassName=FiducialMark, CompType=Fiducial, MountType=N/A, PackageReference=N/A, PartNumber=N/A
H5 H6 H7 H8: library part CMP-0003620-1, "Bumpon, Hemisphere, 0.44 X 0.20, Clear", Manufacturer=3M, Supplier Part Number 1=SJ5303-7-ND, ComponentLink1Description="Datasheet Link", ComponentLink1URL=http://multimedia.mmm.com/mws/mediawebserver.dyn?6666660Zjcf6lVs6EVs666cIsCOrrrrQ-, CompType=Bumpon, Key="SJ-5303 (CLEAR)", LatestRevisionDate=2017-03-09, MountType=N/A, PackageReference="Transparent Bumpon", PartNumber="SJ-5303 (CLEAR)", Publisher="Texas Instruments", RoHS=Y, Supplier 1=Digi-Key, Supplier 2=Newark, Supplier 3=Mouser, Supplier Part Number 2=23M7326, Supplier Part Number 3=517-SJ-5303CL
J1 J2 J12 JP13: library part CMP-0054798-2, "Header, 2.54 mm, 4x1, Gold, TH", Color=Black, Manufacturer="Wurth Elektronik", Supplier Part Number 1=732-5317-ND, Cert_UL=Y, ClassName=Header, ComponentLink1Description="Datasheet URL", ComponentLink1URL=http://katalog.we-online.de/em/datasheet/6130xx11121.pdf, CompType=Header, ContactFinish=Gold, Gender=Male, MountType=TH, Orientation=Vertical, PackageReference="Header, 2.54mm, 4x1, TH", PartNumber=61300411121, PinCount=4, Pitch_mm=2.54, RoHS=Y, Row_Count=1, Shrouded=N, Supplier 1=Digi-Key, Supplier 2=Newark, Supplier 3=Farnell, Supplier Part Number 2=20X0951, Supplier Part Number 3=2356155
J3 J4 J5 J6 J7 J8 J9 JP4 JP14: library part CMP-0054794-2, "Header, 2.54 mm, 2x1, Gold, TH", Color=Black, Manufacturer="Wurth Elektronik", Supplier Part Number 1=732-5315-ND, Cert_UL=Y, ClassName=Header, ComponentLink1Description="Datasheet URL", ComponentLink1URL=http://katalog.we-online.de/em/datasheet/6130xx11121.pdf, CompType=Header, ContactFinish=Gold, Gender=Male, Green_EU RoHS=Passed, Green_EU RoHS-2=Incomplete, Green_Lifecycle=Active, Green_REACh=Passed, MountType=TH, Orientation=Vertical, PackageReference="Header, 2.54mm, 2x1, TH", PartNumber=61300211121, PinCount=2, Pitch_mm=2.54, RoHS=Y, Row_Count=1, Shrouded=N, Supplier 1=Digi-Key, Supplier 2=Newark, Supplier 3=Mouser, Supplier Part Number 2=20X0948, Supplier Part Number 3=710-61300211121
J11 JP1 JP2 JP3 JP6 JP9 JP10 JP11 JP12: library part CMP-0054796-2, "Header, 2.54 mm, 3x1, Gold, TH", Color=Black, Manufacturer="Wurth Elektronik", Supplier Part Number 1=732-5316-ND, Cert_UL=Y, ClassName=Header, ComponentLink1Description="Datasheet URL", ComponentLink1URL=http://katalog.we-online.de/em/datasheet/6130xx11121.pdf, CompType=Header, ContactFinish=Gold, Gender=Male, Green_EU RoHS=Passed, Green_EU RoHS-2=Incomplete, Green_Lifecycle=Active, Green_REACh=Passed, MountType=TH, Orientation=Vertical, PackageReference="Header, 2.54mm, 3x1, TH", PartNumber=61300311121, PinCount=3, Pitch_mm=2.54, RoHS=Y, Row_Count=1, Shrouded=N, Supplier 1=Digi-Key, Supplier 2=Newark, Supplier 3=Farnell, Supplier Part Number 2=20X0950, Supplier Part Number 3=356154
J14 J16: library part CMP-0054762-1, "Receptacle, 2.54mm, 10x1, Gold, TH", Color=Black, Current_A=3A, Manufacturer="Wurth Elektronik", Supplier Part Number 1=732-2859-ND, Voltage_V=250V, Cert_CSA=Y, CNHeader=FALSE, ComponentLink1Description="Datasheet URL", ComponentLink1URL=http://katalog.we-online.de/em/datasheet/6130xx11821.pdf, CompType=Receptacle, ContactFinish=Gold, CT=FALSE, Gender=Female, LatestRevisionDate=26/05/2017, MountType=TH, Orientation=Vertical, PackageReference="Receptacle, 2.54mm, 10x1, TH", PartNumber=61301011821, PinCount=10, Pitch_mm=2.54, Publisher="Texas Instruments", RoHS=Y, Row_Count=1, Supplier 1=Digi-Key, Supplier 2=Newark, Supplier 3=Mouser, Supplier Part Number 2=16T0628, Supplier Part Number 3=710-61301011821
J15: library part CMP-0079535-2, "Header, 2.54mm, 4x2, Gold, SMT", Color=Black, Current_A=3A, Manufacturer="Wurth Elektronik", Supplier Part Number 1=732-5462-5-ND, Voltage_V=250V, Cert_UL=Y, ClassName=Header, ComponentLink1Description="Datasheet URL", ComponentLink1URL=http://katalog.we-online.de/em/datasheet/6100xx21121.pdf, CompType=Header, ContactFinish=Gold, Gender=Male, MountType=SMT, Orientation=Vertical, PackageReference="Header, 2.54mm, 4x2, SMT", PartNumber=61000821121, PinCount=8, Pitch_mm=2.54, RoHS=Y, Row_Count=2, RowSpacing_mm=2.54, Shrouded=N, Supplier 1=Digi-Key, Supplier 2=Newark, Supplier 3=Mouser, Supplier Part Number 2=20X0851, Supplier Part Number 3=710-61000821121
L1: library part CMP-0064168-1, "Inductor, Shielded, 1 uH, 7.2 A, 0.012 ohm, SMD", Manufacturer="Wurth Elektronik", Value1="0.012 ohm", Value2=7.2A, ValueDisplayed=1uH, AEC Category=Q200, AEC Grade=N/A, AEC Qualified=N, ComponentLink1Description="Datasheet link", ComponentLink1URL="https://sps06.itg.ti.com/sites/KMS/crossdivteams/altium/docs/ComponentDatasheets/74438356010 Wurth.pdf", CompType=Inductor, DCR_ohm=0.012, Green_EU RoHS=Passed, Green_EU RoHS-2=Incomplete, Green_Lifecycle=Active, Green_REACh=Passed, Imax_A=7.2A, Ind_H=1µH, Irms="7.2A @ 40C rise", Isat="9A @ 20% inductance drop", LatestRevisionDate=2017-06-02, Material=?, MountType=SMT, PackageReference=4.1x4.1mm, PartNumber=74438356010, Published=2008-06-26, Publisher="Texas Instruments", RoHS=Y, SizeArea_mm2=16.81, SizeAreaWB_mm2=26.01, SizeX_mm=4.1, SizeY_mm=4.1, SizeZ_mm=2.1, Technology=Shielded
L2: library part CMP-0063791-1, "Inductor, Wirewound, Ferrite, 2.2 uH, 1.8 A, 0.08 ohm, SMD", Manufacturer="Wurth Elektronik", Supplier Part Number 1=732-5436-1-ND, Value1="0.08 ohm", Value2=1.8A, ValueDisplayed=2.2uH, AEC Category=Q200, AEC Grade=N/A, AEC Qualified=N, ComponentLink1Description="Datasheet link", ComponentLink1URL=http://katalog.we-online.de/pbs/datasheet/74404024022.pdf, CompType=Inductor, DCR_ohm=0.08, Green_EU RoHS=Passed, Green_EU RoHS-2=Incomplete, Green_Lifecycle=Active, Green_REACh=Passed, Imax_A=1.8A, Ind_H=2.2µH, Irms="1.8A @ 40C rise", Isat="1.95A @ 30% inductance drop", LatestRevisionDate=2017-06-02, Material=Ferrite, MountType=SMT, PackageReference="SMD, 2.5x2mm", PartNumber=74404024022, Published=2008-06-26, Publisher="Texas Instruments", RoHS=Y, SizeArea_mm2=5, SizeAreaWB_mm2=10.5, SizeX_mm=2.5, SizeY_mm=2, SizeZ_mm=1.2, Supplier 1=Digi-Key, Supplier 2=Newark, Supplier 3=Mouser, Supplier Part Number 2=75X1095, Supplier Part Number 3=710-74404024022, Technology=Wirewound
L3: library part CMP-0080775-1, "Inductor, Shielded, Metal Composite, 2.2 µH, 1.8 A, 0.116 ohm, SMD", Manufacturer=MuRata, PartNumber=DFE201612E-2R2M=P2, Value1="0.116 ohm", Value2=1.8A, ValueDisplayed=2.2µH, AEC Category=Q200, AEC Grade=N/A, AEC Qualified=N, ComponentLink1Description="Datasheet link", ComponentLink1URL=http://www.murata.com/~/media/webrenewal/products/inductor/chip/tokoproducts/wirewoundmetalalloychiptype/m_dfe201612e.ashx?la=en-us, CompType=Inductor, DCR_ohm=1.16d, Imax_A=1.8A, Ind_H=2.2µH, Irms="1.8A @ 40C rise", Isat="2.4A @ 30% inductance drop", Material="Metal Composite", MountType=SMT, PackageReference=2x1.6mm, RoHS=Y, SizeArea_mm2=3.2, SizeAreaWB_mm2=7.8, SizeX_mm=2, SizeY_mm=1.6, SizeZ_mm=1.2, Technology=Shielded
LBL1: library part CMP-0003625-1, "Thermal Transfer Printable Labels, 0.650\" W x 0.200\" H - 10,000 per roll", Manufacturer=Brady, Supplier Part Number 1=97C5133, ClassName=Label, ComponentLink1Description="Web Page", ComponentLink1URL=http://www.bradyid.com/bradyid/pdpv/THT-14-423-10.html, CompType=Label, Key=THT-14-423-10, LatestRevisionDate=2017-03-09, MountType=N/A, Note="Size: 0.65\" x 0.20 \"", PackageReference="PCB Label 0.650 x 0.200 inch", PartNumber=THT-14-423-10, Publisher="Texas Instruments", RoHS=Y, Supplier 1=Newark, Supplier 2=Farnell, Supplier Part Number 2=2065596
Logo1: library part CMP-0074844-1, LatestRevisionDate=2017-07-06, Lib Reference="CE Mark", PartNumber="CE Mark", Published=2009-03-03, Publisher="Texas Instruments", SymbolCreator=a0412235
Logo3: library part CMP-0074847-1, "FCC_disclaimer", LatestRevisionDate=2017-07-06, Lib Reference=FCC_disclaimer, PartNumber="FCC disclaimer", Published=2009-03-03, Publisher="Texas Instruments"
Logo4: library part CMP-0074769-1, Lib Reference="WEEE logo", PartNumber="WEEE logo"
Q1: library part CMP-0080799-1, "MOSFET, N-CH, 12 V, 4.3 A, YJK0003A (PICOSTAR-3)", Alternate Manufacturer=None, Manufacturer="Texas Instruments", Supplier Part Number 1=296-47751-1-ND, Value1="0.019 ohm", Value2="3.9 nC", AEC Category=Q101, AEC Qualified=N, ChType=N, ComponentLink1Description="Datasheet link", ComponentLink1URL=http://www.ti.com/lit/ds/symlink/csd13385f5.pdf, CompType=MOSFET, IdsMax_A=4.3A, MountType=SMT, PackageReference=YJK0003A, PartNumber=CSD13385F5, QgTyp_nC=3.9, Rdson45_ohm=0.019, RoHS=Y, SizeArea_mm2=1.0877, SizeAreaWB_mm2=4.3077, SizeX_mm=1.49, SizeY_mm=0.73, SizeZ_mm=0.35, Supplier 1=Digi-Key, Supplier 2=Mouser, Supplier Part Number 2=595-CSD13385F5, VdsMax_V=12V, Vgs_V=8V
R1: library part CMP-0026435-2, "RES, 511 k, 1%, 0.063 W, AEC-Q200 Grade 0, 0402", Manufacturer=Vishay-Dale, Power_W=63mW, Supplier Part Number 1=541-511KLCT-ND, TempCo="100 ppm/C", Tolerance_%=1%, Value2=0.063W, Value_Code=511k, AEC Category=Q200, AEC Grade=0, AEC Qualified=Y, ComponentLink1Description="Datasheet link", ComponentLink1URL=http://www.vishay.com/docs/20035/dcrcwe3.pdf, CompType=Resistor, EIA_Code=E96, MountType=SMT, PackageReference=0402, PartNumber=CRCW0402511KFKED, Res_ohm=511k, RoHS=E, SizeArea_mm2=0.5, SizeX_mm=1, SizeY_mm=0.5, SizeZ_mm=0.6, Supplier 1=Digi-Key, Supplier 2=Newark, Supplier 3=Mouser, Supplier Part Number 2=52K7134, Supplier Part Number 3=71-CRCW0402-511K-E3, Technology="Thick Film", Value1=1%, ValueDisplayed=511k, VDC_V=50V
R2 R6: library part CMP-0026605-2, "RES, 90.9 k, 1%, 0.063 W, AEC-Q200 Grade 0, 0402", Manufacturer=Vishay-Dale, Power_W=63mW, Supplier Part Number 1=541-90.9KLCT-ND, TempCo="100 ppm/C", Tolerance_%=1%, Value2=0.063W, Value_Code=90k9, ValueDisplayed=90.9k, AEC Category=Q200, AEC Grade=0, AEC Qualified=Y, ComponentLink1Description="Datasheet link", ComponentLink1URL=http://www.vishay.com/docs/20035/dcrcwe3.pdf, CompType=Resistor, EIA_Code=E96, MountType=SMT, PackageReference=0402, PartNumber=CRCW040290K9FKED, Res_ohm=90.9k, RoHS=E, SizeArea_mm2=0.5, SizeX_mm=1, SizeY_mm=0.5, SizeZ_mm=0.6, Supplier 1=Digi-Key, Supplier 2=Newark, Supplier 3=Mouser, Supplier Part Number 2=52K7338, Supplier Part Number 3=71-CRCW0402-90.9K-E3, Technology="Thick Film", Value1=1%, VDC_V=50V
R3: library part CMP-0026721-1, "RES, 100 k, 1%, 0.0625 W, 0402", Manufacturer="Yageo America", Power_W=62.5mW, Supplier Part Number 1=311-100KLRCT-ND, TempCo="100 ppm/C", Tolerance_%=1%, Value2=0.0625W, Value_Code=100k, AEC Category=Q200, AEC Grade=N/A, AEC Qualified=N, ComponentLink1Description="Datasheet link", ComponentLink1URL=http://www.yageo.com/documents/recent/PYu-RC0402_51_RoHS_L_6_r.pdf, CompType=Resistor, EIA_Code=E96, LatestRevisionDate=2017-03-09, MountType=SMT, PackageReference=0402, PartNumber=RC0402FR-07100KL, Published=2008-06-26, Publisher="Texas Instruments", Res_ohm=100k, RoHS=Y, SizeArea_mm2=0.5, SizeX_mm=1, SizeY_mm=0.5, SizeZ_mm=0.6, Supplier 1=Digi-Key, Supplier 2=Newark, Supplier 3=Mouser, Supplier Part Number 2=67R9887, Supplier Part Number 3=603-RC0402FR-07100KL, Technology="Thick Film", U/M=EA, Value1=1%, ValueDisplayed=100k, VDC_V=50V
R4 R5 R14: library part CMP-0026100-2, "RES, 1.00 M, 1%, 0.063 W, AEC-Q200 Grade 0, 0402", Manufacturer=Vishay-Dale, Power_W=63mW, Supplier Part Number 1=541-1.00MLCT-ND, TempCo="100 ppm/C", Tolerance_%=1%, Value2=0.063W, Value_Code=1M00, ValueDisplayed=1.00M, AEC Category=Q200, AEC Grade=0, AEC Qualified=Y, ComponentLink1Description="Datasheet link", ComponentLink1URL=http://www.vishay.com/docs/20035/dcrcwe3.pdf, CompType=Resistor, EIA_Code=E96, MountType=SMT, PackageReference=0402, PartNumber=CRCW04021M00FKED, Res_ohm=1M, RoHS=E, SizeArea_mm2=0.5, SizeX_mm=1, SizeY_mm=0.5, SizeZ_mm=0.6, Supplier 1=Digi-Key, Supplier 2=Newark, Supplier 3=Mouser, Supplier Part Number 2=52K6593, Supplier Part Number 3=71-CRCW0402-1.0M-E3, Technology="Thick Film", Value1=1%, VDC_V=50V
R7 R8: library part CMP-0026690-1, "RES, 267 k, 1%, 0.1 W, AEC-Q200 Grade 0, 0402", Manufacturer=Panasonic, Power_W=100mW, Supplier Part Number 1=P267KLCT-ND, TempCo="100 ppm/C", Tolerance_%=1%, Value2=0.1W, Value_Code=267k, AEC Category=Q200, AEC Grade=0, AEC Qualified=Y, ComponentLink1Description="Datasheet link", ComponentLink1URL=http://industrial.panasonic.com/cdbs/www-data/pdf/RDA0000/AOA0000CE2.pdf, CompType=Resistor, EIA_Code=E96, LatestRevisionDate=2017-03-09, MountType=SMT, PackageReference=0402, PartNumber=ERJ-2RKF2673X, Published=2008-06-26, Publisher="Texas Instruments", Res_ohm=267k, RoHS=Y, SizeArea_mm2=0.5, SizeX_mm=1, SizeY_mm=0.5, SizeZ_mm=0.6, Supplier 1=Digi-Key, Supplier 2=Newark, Supplier 3=Mouser, Supplier Part Number 2=53W4303, Supplier Part Number 3=667-ERJ-2RKF2673X, Technology="Thick Film", U/M=EA, Value1=1%, ValueDisplayed=267k, VDC_V=50V
R9: library part CMP-0025952-1, "RES, 102 k, 1%, 0.063 W, 0402", Manufacturer=Vishay-Dale, Power_W=63mW, Supplier Part Number 1=541-102KLCT-ND, TempCo="100 ppm/C", Tolerance_%=1%, Value2=0.063W, Value_Code=102k, AEC Category=Q200, AEC Qualified=?, ComponentLink1Description="Datasheet link", ComponentLink1URL=http://www.vishay.com/docs/20035/dcrcwe3.pdf, CompType=Resistor, EIA_Code=E96, LatestRevisionDate=2017-03-09, MountType=SMT, PackageReference=0402, PartNumber=CRCW0402102KFKED, Published=2008-06-26, Publisher="Texas Instruments", Res_ohm=102k, RoHS=Y, SizeArea_mm2=0.5, SizeX_mm=1, SizeY_mm=0.5, SizeZ_mm=0.6, Supplier 1=Digi-Key, Supplier 2=Newark, Supplier 3=Mouser, Supplier Part Number 2=52K6611, Supplier Part Number 3=71-CRCW0402-102K-E3, Technology="Thick Film", U/M=EA, Value1=1%, ValueDisplayed=102k, VDC_V=50V
R10 R13: library part CMP-0026647-2, "RES, 0.1, 1%, 0.125 W, AEC-Q200 Grade 0, 0402", Manufacturer=Panasonic, Power_W=125mW, Supplier Part Number 1=P.10AKCT-ND, TempCo="300 ppm/C", Tolerance_%=1%, Value2=0.125W, Value_Code=R100, ValueDisplayed=0.1, AEC Category=Q200, AEC Grade=0, AEC Qualified=Y, ComponentLink1Description="Datasheet link", ComponentLink1URL=https://industrial.panasonic.com/cdbs/www-data/pdf/RDN0000/AOA0000C313.pdf, CompType=Resistor, EIA_Code=E96, MountType=SMT, PackageReference=0402, PartNumber=ERJ-2BSFR10X, Res_ohm=0.1, RoHS=Y, SizeArea_mm2=0.5, SizeAreaWB_mm2=3, SizeX_mm=1, SizeY_mm=0.5, SizeZ_mm=0.6, Supplier 1=Digi-Key, Supplier 2=Mouser, Supplier Part Number 2=667-ERJ-2BSFR10X, Technology="Thick Film", Value1=1%
R11: library part CMP-0026535-2, "RES, 71.5 k, 1%, 0.063 W, AEC-Q200 Grade 0, 0402", Manufacturer=Vishay-Dale, Power_W=63mW, Supplier Part Number 1=541-71.5KLCT-ND, TempCo="100 ppm/C", Tolerance_%=1%, Value2=0.063W, Value_Code=71k5, ValueDisplayed=71.5k, AEC Category=Q200, AEC Grade=0, AEC Qualified=Y, ComponentLink1Description="Datasheet link", ComponentLink1URL=http://www.vishay.com/docs/20035/dcrcwe3.pdf, CompType=Resistor, EIA_Code=E96, MountType=SMT, PackageReference=0402, PartNumber=CRCW040271K5FKED, Res_ohm=71.5k, RoHS=E, SizeArea_mm2=0.5, SizeX_mm=1, SizeY_mm=0.5, SizeZ_mm=0.6, Supplier 1=Digi-Key, Supplier 2=Newark, Supplier 3=Mouser, Supplier Part Number 2=52K7250, Supplier Part Number 3=71-CRCW0402-71.5K-E3, Technology="Thick Film", Value1=1%, VDC_V=50V
R12: library part CMP-0026441-2, "RES, 52.3 k, 1%, 0.063 W, AEC-Q200 Grade 0, 0402", Manufacturer=Vishay-Dale, Power_W=63mW, Supplier Part Number 1=541-52.3KLCT-ND, TempCo="100 ppm/C", Tolerance_%=1%, Value2=0.063W, Value_Code=52k3, ValueDisplayed=52.3k, AEC Category=Q200, AEC Grade=0, AEC Qualified=Y, ComponentLink1Description="Datasheet link", ComponentLink1URL=http://www.vishay.com/docs/20035/dcrcwe3.pdf, CompType=Resistor, EIA_Code=E96, MountType=SMT, PackageReference=0402, PartNumber=CRCW040252K3FKED, Res_ohm=52.3k, RoHS=E, SizeArea_mm2=0.5, SizeX_mm=1, SizeY_mm=0.5, SizeZ_mm=0.6, Supplier 1=Digi-Key, Supplier 2=Newark, Supplier 3=Mouser, Supplier Part Number 2=52K7137, Supplier Part Number 3=71-CRCW0402-52.3K-E3, Technology="Thick Film", Value1=1%, VDC_V=50V
R15: library part CMP-0026658-1, "RES, 10.0 k, 1%, 0.1 W, 0402", Manufacturer=Panasonic, Power_W=100mW, Supplier Part Number 1=P10.0KLCT-ND, TempCo="100 ppm/C", Tolerance_%=1%, Value2=0.1W, Value_Code=10k0, ValueDisplayed=10.0k, AEC Category=Q200, AEC Qualified=?, ComponentLink1Description="Datasheet link", ComponentLink1URL=http://industrial.panasonic.com/www-data/pdf/AOA0000/AOA0000CE2.pdf, CompType=Resistor, EIA_Code=E96, LatestRevisionDate=2017-03-09, MountType=SMT, PackageReference=0402, PartNumber=ERJ-2RKF1002X, Published=2008-06-26, Publisher="Texas Instruments", Res_ohm=10k, RoHS=Y, SizeArea_mm2=0.5, SizeX_mm=1, SizeY_mm=0.5, SizeZ_mm=0.6, Supplier 1=Digi-Key, Supplier 2=Newark, Supplier 3=Mouser, Supplier Part Number 2=90W2949, Supplier Part Number 3=667-ERJ-2RKF1002X, Technology="Thick Film", U/M=EA, Value1=1%, VDC_V=50V
U1: library part CMP-0076712-3, "High Current, High Efficiency Single Inductor Buck-Boost Converter, DLA0010A (VQFN-HR-10)", Alternate Manufacturer="Texas Instruments", Alternate PartNumber=TPS63802DLAT, ComponentLink1Description="Datasheet Link", ComponentLink1URL=https://sps06.itg.ti.com/sites/KMS/crossdivteams/altium/docs/ComponentDatasheets/TPS63802_pinout.PNG, CompType=IC, LatestRevisionDate=2017-07-18, Manufacturer="Texas Instruments", MountType=SMT, PackageDescription=VQFN-HR-10, PackageReference=DLA0010A, PartNumber=TPS63802DLAR, Publisher="Texas Instruments", SizeArea_mm2=6.0, SizeAreaWB_mm2=12.0, SizeX_mm=2.0, SizeY_mm=3.0, SizeZ_mm=1.0, U/M=EA
U2: library part CMP-0079929-1, "Synchronous Boost Converter with 800 nA Ultra-Low Quiescent Current, DRV0006A (WSON-6)", Alternate Manufacturer="Texas Instruments", Alternate PartNumber=TPS610995DRVT, AEC Category=Q200, AEC Qualified=N, ComponentLink1Description="Datasheet Link", ComponentLink1URL=http://www.ti.com/lit/ds/symlink/tps61099.pdf, ComponentLink2Description="Product Folder", ComponentLink2URL=http://www.ti.com/product/tps61099, ComponentLink3Description="Online Datasheet", ComponentLink3URL=http://www.ti.com/product/tps61099/datasheet, CompType=IC, Manufacturer="Texas Instruments", MountType=SMT, PackageDescription=WSON-6, PackageReference=DRV0006A, PartNumber=TPS610995DRVR, SizeArea_mm2=4, SizeAreaWB_mm2=9, SizeX_mm=2, SizeY_mm=2, SizeZ_mm=0.8
U3: library part CMP-0081431-3, "Ultra low IQ Step Down Converter, DLC0008A (VSON-HR-8)", Alternate Manufacturer="Texas Instruments", Operating Temperature Range="-40 to 125 C", AEC Category=Q200, AEC Qualified=N, ComponentLink1Description="Datasheet Link", ComponentLink1URL=http://www.ti.com/lit/ds/symlink/tps62840.pdf, ComponentLink2Description="Product Folder", ComponentLink2URL=http://www.ti.com/product/tps62840, ComponentLink3Description="Online Datasheet", ComponentLink3URL=http://www.ti.com/product/tps62840/datasheet, CompType=IC, Manufacturer="Texas Instruments", MountType=SMT, PackageDescription=VSON-HR-8, PackageReference=DLC0008A, PartNumber=TPS62840DLCR, SizeArea_mm2=3, SizeAreaWB_mm2=7.5, SizeX_mm=1.5, SizeY_mm=2, SizeZ_mm=1
ZZ1: library part CMP-0003616-3, ClassName=AssemblyNote, CompType=AssemblyNote, Key=AssemblyNoteLabel, LatestRevisionDate=2017-03-09, Publisher="Texas Instruments"
ZZ2: library part CMP-0077236-1, ClassName=AssemblyNote, CompType=AssemblyNote, Key=AssemblyNote, LatestRevisionDate=2017-08-10, Publisher="Texas Instruments"
ZZ3: library part CMP-0077237-1, ClassName=AssemblyNote, CompType=AssemblyNote, Key=AssemblyNote, LatestRevisionDate=2017-08-10, Publisher="Texas Instruments"
ZZ4: library part CMP-0077238-1, ClassName=AssemblyNote, CompType=AssemblyNote, Key=AssemblyNote, LatestRevisionDate=2017-08-10, Publisher="Texas Instruments"

## Via types
v1: diameter 19.68, hole 7.87, Top Layer to Bottom Layer, tented top, 38 vias
v2: diameter 24, hole 10, Top Layer to Bottom Layer, tented top, 8 vias
v3: diameter 19.68, hole 7.87, Top Layer to Bottom Layer, 2 vias

## Nets (pads, with @x,y where several pads share a name; then routed paths per layer and width w, separated by ;. In a path a pad name is that pad's centre, name@x,y a point inside that pad or via, vN(x,y) a via of type N, cw(c..) or ccw(c..) an arc to the next point about the centre after c; other vN are vias at no path point)
BAT1: BT1.2 BT2.1 BT3.2 BT4.1 J11.3 | length 3082.9
  Top Layer w50: J11.3@1130,1669.41 1130,1841.13 1288.87,2000 1636.93,2000 BT4.1@1656.93,2020